# EAGLE board board (EAGLE 9.4.2)
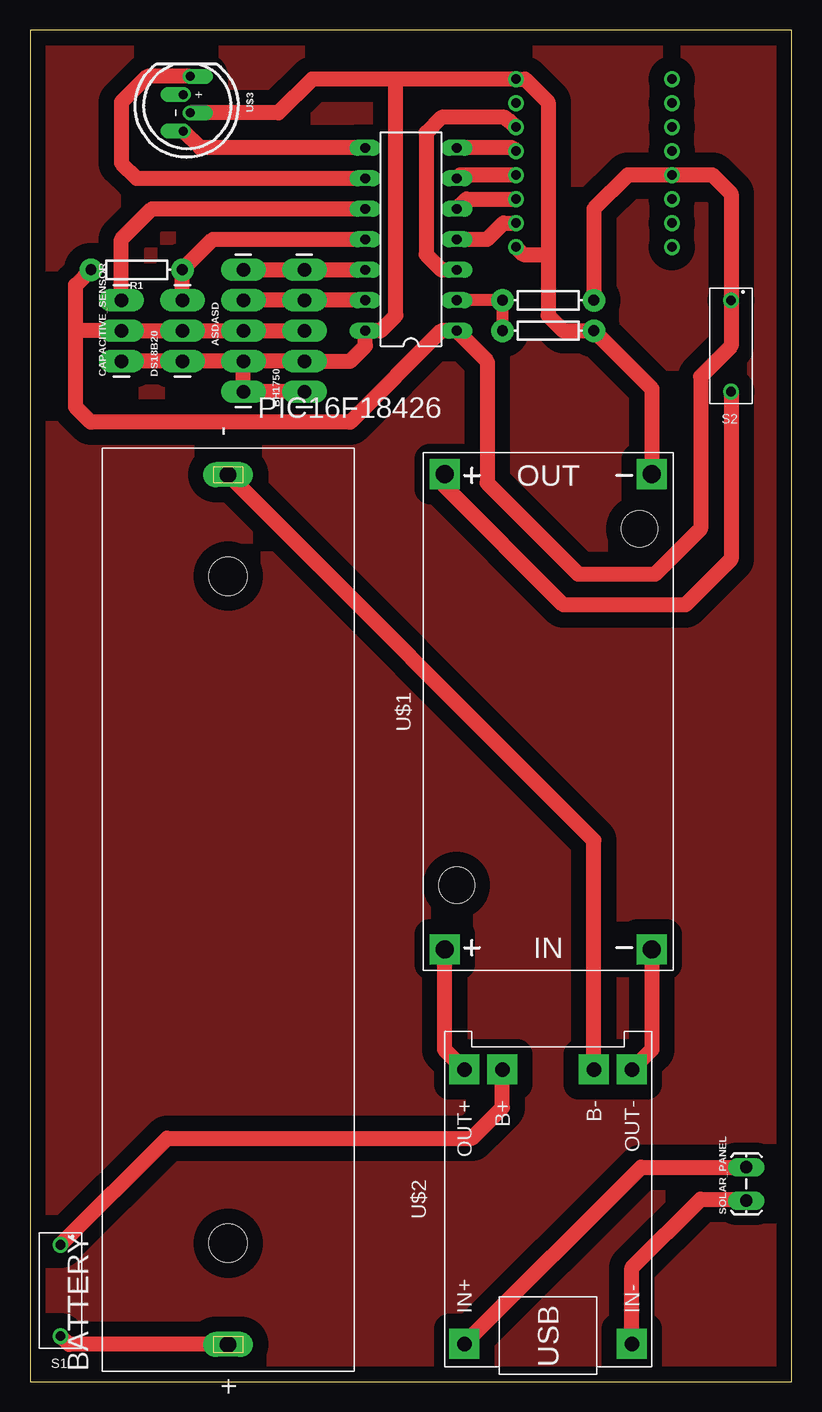
[diagram p0: board, top side]
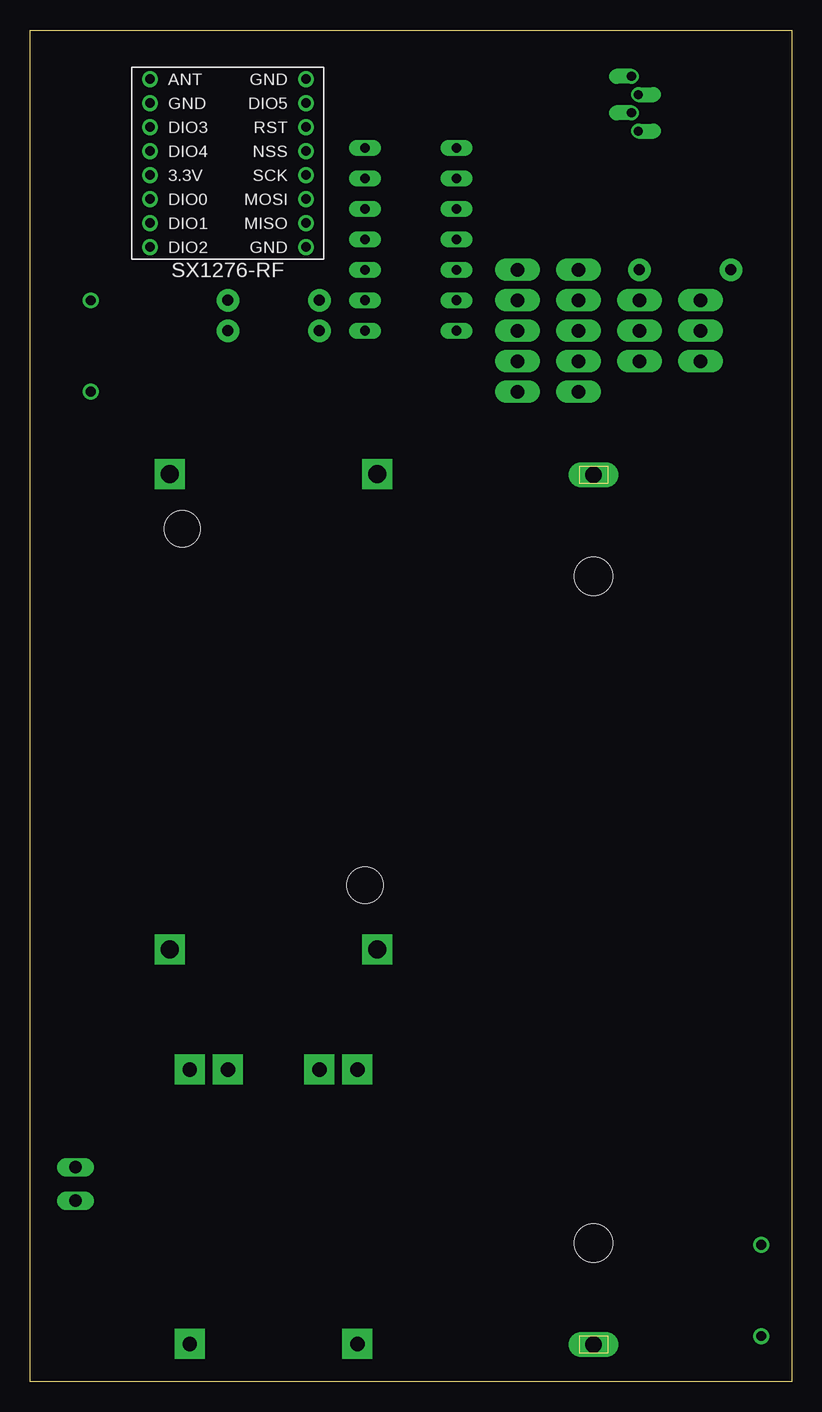
[diagram p1: board, bottom side, seen from below]

Size 63.48 x 112.7 mm. Coordinates in mm from the lower left corner, seen from the top.
Outline: 0,0 63.48,0 63.48,112.7 0,112.7 0,0
Copper layers (1*16): Top 0.035mm / dielectric 1.5mm / Bottom 0.035mm
Design rules "default": minimum track width 6mil, minimum drill 0.35mm, track to track 6mil, track to pad 6mil, pad to pad 6mil, via to via 6mil, smd to smd 6mil, copper to edge 40mil, drill to drill 6mil, minimum pad ring 10mil, minimum via ring 8mil, stop-mask expansion 4mil, vias tented up to drill 0mil, thermal gap 10mil
Net classes: 0 default: clearance 0.205 mm

## Footprints (pad centres in the part's own frame; a part is rotated, then mirrored left to right if it is on the bottom)
1X05_LONGPADS = drill 1.118 pad 1.88 long: 1 0,0; 2 2.54,0; 3 5.08,0; 4 7.62,0; 5 10.16,0
MPD_BK-18650-PC2 = drill 1.38 long: M 36.25,0; P -36.25,0 | hole 3.2: 27.805,0; -27.805,0
1X03_LONGPADS = drill 1.118 pad 1.88 long: 1 0,0; 2 2.54,0; 3 5.08,0
DIL14 = drill 0.813 long: 1 -10.16,-3.81; 2 -7.62,-3.81; 3 -5.08,-3.81; 4 -2.54,-3.81; 5 0,-3.81; 6 2.54,-3.81; 7 5.08,-3.81; 8 5.08,3.81; 9 2.54,3.81; 10 0,3.81; 11 -2.54,3.81; 12 -5.08,3.81; 13 -7.62,3.81; 14 -10.16,3.81
AXIAL-0.3 = drill 0.9 pad 1.88: P$1 -3.81,0; P$2 3.81,0
418117270901 = drill 0.8: 1 0,-3.81; A1 0,3.81
1X02_LOCK_LONGPADS = drill 1.016 long: 1 -0.127,0; 2 2.667,0
WIRELESS-LORA-RFM95W#THT = drill 0.8: A1 -6.5,7; A2 -6.5,5; A3 -6.5,3; A4 -6.5,1; A5 -6.5,-1; A6 -6.5,-3; A7 -6.5,-5; A8 -6.5,-7; B1 6.5,7; B2 6.5,5; B3 6.5,3; B4 6.5,1; B5 6.5,-1; B6 6.5,-3; B7 6.5,-5; B8 6.5,-7
DC-DC-STEP-DOWN-LM2596 = drill 1.5 pad 2.5 square: IN+ -19.812,8.636; IN- -19.812,-8.636; OUT+ 19.812,8.636; OUT- 19.812,-8.636 | hole 3: -14.478,7.62; 15.24,-7.62
BATTERY-CHARGER-LI-PROT = drill 1.2 pad 2.5 square: B+ 10.795,3.81; B- 10.795,-3.81; IN+ -12.065,6.985; IN- -12.065,-6.985; OUT+ 10.795,6.985; OUT- 10.795,-6.985
WS2812B-PTH-KIT = drill 0.762 pad 1.27 offset: 1 2.413,0.079; 2 0.889,0.651; 3 -0.635,0.079; 4 -2.159,0.651

## Placement (x,y rotation side)
ASDASD  [1X05_LONGPADS]  17.78,82.55 90 top
BATTERY  BK-18650-PC2  [MPD_BK-18650-PC2]  16.51,39.37 90 top
BH1750  [1X05_LONGPADS]  22.86,82.55 90 top
CAPACITIVE_SENSOR  [1X03_LONGPADS]  7.62,85.09 90 top
DS18B20  [1X03_LONGPADS]  12.7,85.09 90 top
PIC16F18426  PIC16F8DIL  [DIL14]  31.75,97.79 90 top
R1  1k  [AXIAL-0.3]  8.89,92.71 180 top
R2  1M  [AXIAL-0.3]  43.18,90.17 0 top
R3  1M  [AXIAL-0.3]  43.18,87.63 0 top
S1  418117270901  [418117270901]  2.54,7.62 180 top
S2  418117270901  [418117270901]  58.42,86.36 180 top
SOLAR_PANEL  [1X02_LOCK_LONGPADS]  59.69,15.24 90 top
SX1276-RF  WIRELESS-LORA-RFM95W#THT  [WIRELESS-LORA-RFM95W#THT]  46.99,101.6 180 bottom
U$1  DC-DC-STEP-DOWN-LM2596  [DC-DC-STEP-DOWN-LM2596]  43.18,55.88 90 top
U$2  BATTERY-CHARGER-LI-PROT  [BATTERY-CHARGER-LI-PROT]  43.18,15.24 90 top
U$3  WS2812B-PTH  [WS2812B-PTH-KIT]  12.7,106.68 270 top

## Library data of the parts
ASDASD BH1750 CAPACITIVE_SENSOR DS18B20 SOLAR_PANEL = SparkFun-Connectors
BATTERY = BK-18650-PC2; AVAILABILITY: Unavailable; DESCRIPTION: Holder Batt 1/Li-Ion Protected; MF: MPD _Memory; MP: BK-18650-PC2; PACKAGE: DFN-14 MPD _Memory Protection Devices_; PRICE: None
PIC16F18426 = pic16f6xx_14pin
R1 = SparkFun-Resistors; PROD_ID: RES-12182
R2 R3 = SparkFun-Resistors; PROD_ID: RES-09329
S1 S2 = switch_dip; AVAILABILITY: Unavailable; DESCRIPTION: Switch Slide Dip Spst 25ma 24v; MF: Wurth Electronics; MP: 418117270901; PACKAGE: None; PRICE: None
SX1276-RF U$1 U$2 = diy-modules
U$3 = SparkFun-LED

## Nets
B-: BATTERY.M U$2.B-
GND: ASDASD.1 ASDASD.2 BH1750.1 BH1750.2 CAPACITIVE_SENSOR.1 DS18B20.1 PIC16F18426.14 R3.P$2 SX1276-RF.A1 SX1276-RF.A8 U$1.OUT- U$3.2
GND.3: SX1276-RF.B7
N$1: U$1.IN+ U$2.OUT+
N$2: SOLAR_PANEL.1 U$2.IN-
N$3: BATTERY.P S1.A1
N$6: U$1.IN- U$2.OUT-
N$9: SOLAR_PANEL.2 U$2.IN+
RA0: ASDASD.4 BH1750.4 PIC16F18426.13
RA1: ASDASD.5 BH1750.5 PIC16F18426.12
RA2: DS18B20.3 PIC16F18426.11 R1.P$1
RA3: PIC16F18426.4 SX1276-RF.A2
RA4: PIC16F18426.3 SX1276-RF.A6
RA5: PIC16F18426.2 R2.P$1 R3.P$1
RC0: CAPACITIVE_SENSOR.3 PIC16F18426.10
RC1: PIC16F18426.9 U$3.4
RC2: PIC16F18426.8 U$3.1
RC3: PIC16F18426.7 SX1276-RF.A5
RC4: PIC16F18426.6 SX1276-RF.A4
RC5: PIC16F18426.5 SX1276-RF.A3
SB: S1.1 U$2.B+
SS: S2.A1 U$1.OUT+
VCC: ASDASD.3 BH1750.3 CAPACITIVE_SENSOR.2 DS18B20.2 PIC16F18426.1 R1.P$2 R2.P$2 S2.1 SX1276-RF.B4

## Tracks (layer width: path | path; a pad name or v marks a point on that pad's centre or on a via)
B-
  Top 1.27: U$2.B- 46.99,45.14 BATTERY.M
GND
  Top 1.27: ASDASD.2 BH1750.2 26.67,85.09 27.94,86.36 PIC16F18426.14 29.21,87.63 30.48,88.9 30.48,108.6 | ASDASD.2 DS18B20.1 CAPACITIVE_SENSOR.1 | BH1750.1 ASDASD.1 ASDASD.2 | 43.18,93.98 43.18,106.68 41.26,108.6 SX1276-RF.A8 30.48,108.6 | SX1276-RF.A1 41.11,93.98 43.18,93.98 | U$3.2 20.7,105.79 23.51,108.6 30.48,108.6 | 43.18,93.98 43.18,88.9 44.45,87.63 R3.P$2 51.82,82.8 U$1.OUT-
N$1
  Top 1.27: U$2.OUT+ 34.54,27.69 U$1.IN+
N$2
  Top 1.27: U$2.IN- 50.16,9.52 55.88,15.24 59.56,15.24 SOLAR_PANEL.1
N$3
  Top 1.27: BATTERY.P 3.23,3.12 S1.A1
N$4
  pour Top (isolate 1.27): 0,113.03 0,1.27 0,0 63.5,0 63.5,113.03
N$6
  Top 1.27: U$1.IN- 51.82,27.69 U$2.OUT-
N$9
  Top 1.27: U$2.IN+ 50.93,17.91 SOLAR_PANEL.2
RA0
  Top 1.27: PIC16F18426.13 BH1750.4 ASDASD.4
RA1
  Top 1.27: ASDASD.5 BH1750.5 PIC16F18426.12
RA2
  Top 1.27: PIC16F18426.11 15.24,95.25 R1.P$1 DS18B20.3
RA3
  Top 1.27: PIC16F18426.4 38.1,95.25 39.45,96.6 SX1276-RF.A2
RA4
  Top 1.27: SX1276-RF.A6 39.98,105.11 39.87,105.11 39.57,105.41 34.29,105.41 33.02,104.14 33.02,93.98 34.29,92.71 PIC16F18426.3
RA5
  Top 1.016: R3.P$1 R2.P$1 PIC16F18426.2
RC0
  Top 1.27: CAPACITIVE_SENSOR.3 7.62,95.25 10.16,97.79 PIC16F18426.10
RC1
  Top 1.27: U$3.4 9.78,108.84 7.62,106.68 7.62,101.6 8.89,100.33 PIC16F18426.9
RC2
  Top 1.27: PIC16F18426.8 14.18,102.87 U$3.1
RC3
  Top 1.27: SX1276-RF.A5 40.22,102.87 PIC16F18426.7
RC4
  Top 1.27: SX1276-RF.A4 35.83,100.6 PIC16F18426.6
RC5
  Top 1.27: PIC16F18426.5 36.37,98.6 SX1276-RF.A3
SB
  Top 1.27: S1.1 11.43,20.32 36.83,20.32 39.37,22.86 U$2.B+
SS
  Top 1.27: S2.A1 58.42,68.58 54.61,64.77 44.45,64.77 34.54,74.68 U$1.OUT+
VCC
  Top 1.27: R1.P$2 3.81,91.44 3.81,87.63 | BH1750.3 ASDASD.3 DS18B20.2 CAPACITIVE_SENSOR.2 3.81,87.63 | 3.81,87.63 3.81,81.28 5.08,80.01 26.67,80.01 34.29,87.63 PIC16F18426.1 38.1,85.09 38.1,74.93 45.72,67.31 52.07,67.31 55.88,71.12 55.88,83.82 58.42,86.36 S2.1 58.42,99.06 56.88,100.6 SX1276-RF.B4 49.8,100.6 46.99,97.79 R2.P$2